# EAGLE board source_eagle (EAGLE 9.6.2)
REV: B
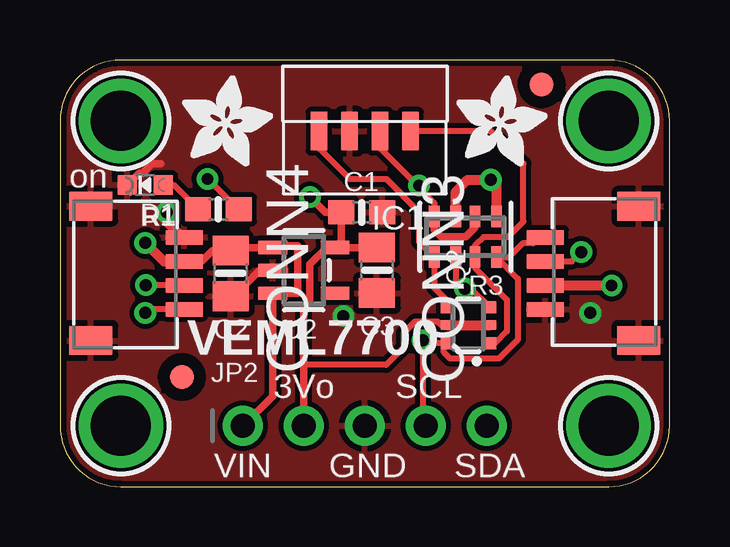
[diagram p0: board, top side]
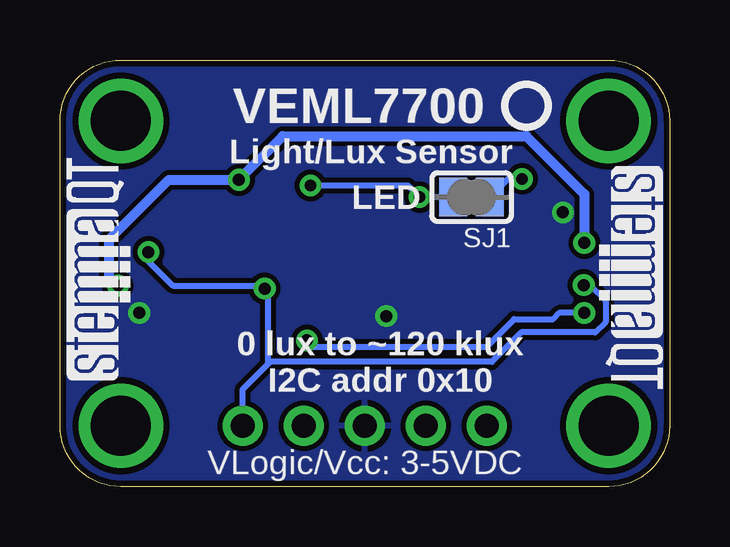
[diagram p1: board, bottom side, seen from below]

Size 25.4 x 17.78 mm. Coordinates in mm from the lower left corner, seen from the top.
Outline: 0,15.24 0,2.54 arc90 2.54,0 22.86,0 arc90 25.4,2.54 25.4,15.24 arc90 22.86,17.78 2.54,17.78 arc90 0,15.24
Copper layers (1*16): Top 0.035mm / dielectric 1.5mm / Bottom 0.035mm
Design rules "adafruit *": minimum track width 8mil, minimum drill 15.5mil, track to track 8mil, track to pad 8mil, pad to pad 8mil, via to via 8mil, smd to smd 8mil, copper to edge 10mil, drill to drill 8mil, minimum pad ring 10mil, minimum via ring 8mil, stop-mask expansion 2mil, vias tented up to drill 20mil, thermal gap 10mil
Net classes: 1 highpower: width 0.305 mm, drill 0.483 mm; 2 lowpower: width 0.254 mm, drill 0.483 mm

## Footprints (pad centres in the part's own frame; a part is rotated, then mirrored left to right if it is on the bottom)
0603-NO = smd 1.075 x 1: 1 -0.85,0; 2 0.85,0
0805-NO = smd 1.24 x 1.5: 1 -0.95,0; 2 0.95,0
JST_SH4 = smd 0.6 x 1.55: 1 -1.5,2.514; 2 -0.5,2.514; 3 0.5,2.514; 4 1.5,2.514 | smd 1.2 x 1.8: MT1 -2.8,-1.386; MT2 2.8,-1.386
CHIPLED_0603_NOOUTLINE = smd 0.8 x 0.8: A 0,-0.75; C 0,0.75
FIDUCIAL_1MM = smd 1 x 1: 1 0,0
VEML7700 = smd 0.7 x 1.6: 1 -1.905,-1.1; 2 -0.635,-1.1; 3 0.635,-1.1; 4 1.905,-1.1
1X05_ROUND = drill 1 pad 1.676: 1 -5.08,0; 2 -2.54,0; 3 0,0; 4 2.54,0; 5 5.08,0
SOT363 = smd 0.5 x 0.5: 1 -0.75,-0.9; 3 0.75,-0.9; 4 0.75,0.9; 6 -0.75,0.9 | smd 0.4 x 0.5: 2 0,-0.9; 5 0,0.9
RESPACK_4X0603 = smd 0.45 x 0.9: 1 -1.3,-0.85; 2 -0.4,-0.85; 3 0.4,-0.85; 4 1.3,-0.85; 5 1.3,0.85; 6 0.4,0.85; 7 -0.4,0.85; 8 -1.3,0.85
SOLDERJUMPER_CLOSEDWIRE = smd 1.168 x 1.6: 1 -0.762,0; 2 0.762,0 | smd 0.635 x 0.203: WIRE 0,0
SOT23-5 = smd 0.55 x 1.2: 1 -0.95,-1.3; 2 0,-1.3; 3 0.95,-1.3; 4 0.95,1.3; 5 -0.95,1.3
MOUNTINGHOLE_2.5_PLATED = drill 2.5 pad 3.2: P$1 0,0

## Placement (x,y rotation side)
C1  0.1uF  [0603-NO]  12.57,11.43 0 top
C2  10uF  [0805-NO]  7.11,8.89 270 top
C3  10uF  [0805-NO]  13.21,9.02 270 top
CONN3  STEMMA_I2C_QT  [JST_SH4]  22.73,8.89 90 top
CONN4  STEMMA_I2C_QT  [JST_SH4]  2.67,8.89 270 top
D1  GREEN  [CHIPLED_0603_NOOUTLINE]  3.56,12.57 90 top
FID3  FIDUCIAL_1MM  [FIDUCIAL_1MM]  5.08,4.57 0 top
FID4  FIDUCIAL_1MM  [FIDUCIAL_1MM]  20.07,16.76 0 top
IC1  VEML7700  [VEML7700]  12.7,13.72 180 top
JP2  [1X05_ROUND]  12.7,2.54 0 top
Q2  BSS138  [SOT363]  17.02,6.73 90 top
R1  47K  [0603-NO]  6.6,11.56 180 top
R3  4.7K  [RESPACK_4X0603]  16.89,10.41 180 top
SJ1  [SOLDERJUMPER_CLOSEDWIRE]  8.26,12.06 180 bottom
U2  AP2112K-3.3  [SOT23-5]  10.16,9.02 270 top
U$1  MOUNTINGHOLE2.5  [MOUNTINGHOLE_2.5_PLATED]  2.54,15.24 0 top
U$2  [KATTNI_STOP]  15.75,7.87 0 bottom
U$4  [ADAFRUIT_3.5MM]  16.51,13.34 0 top
U$17  MOUNTINGHOLE2.5  [MOUNTINGHOLE_2.5_PLATED]  22.86,15.24 0 top
U$19  MOUNTINGHOLE2.5  [MOUNTINGHOLE_2.5_PLATED]  2.54,2.54 0 top
U$21  MOUNTINGHOLE2.5  [MOUNTINGHOLE_2.5_PLATED]  22.86,2.54 0 top
U$22  [ADAFRUIT_3.5MM]  5.08,13.34 0 top
U$25  [PCBFEAT-REV-040]  5.97,15.88 0 bottom
U$30  [STEMMAQT]  22.48,4.45 90 bottom
U$31  [STEMMAQT]  2.92,13.34 270 bottom

## Library data of the parts
C1-C3 CONN3 CONN4 D1 JP2 Q2 R1 R3 SJ1 U$4 U$22 U$25 = microbuilder
FID3 FID4 = microbuilder; BOM: EXCLUDE
IC1 = VEML7700
U2 = adafruit_power
U$1 U$17 U$19 U$21 = adafruit_electromech; BOM: EXCLUDE
U$2 U$30 U$31 = silks

## Nets
3.3V [lowpower]: C1.1 C3.1 IC1.2 JP2.2 Q2.2 Q2.5 R3.2 R3.4 SJ1.2 U2.5
GND [highpower]: C1.2 C2.2 C3.2 CONN3.1 CONN3.MT1 CONN3.MT2 CONN4.1 CONN4.MT1 CONN4.MT2 D1.C IC1.3 JP2.3 U2.2
N$1: D1.A R1.2
N$2 [lowpower]: R1.1 SJ1.1
SCL: CONN3.4 CONN4.4 JP2.4 Q2.6 R3.8
SCL_3V: IC1.1 Q2.1 R3.7
SDA: CONN3.3 CONN4.3 JP2.5 Q2.3 R3.6
SDA_3V: IC1.4 Q2.4 R3.5
VCC [highpower]: C2.1 CONN3.2 CONN4.2 JP2.1 R3.1 R3.3 U2.1 U2.3

## Tracks (layer width: path | path; a pad name or v marks a point on that pad's centre or on a via)
3.3V  (via drill 0.48)
  Top 0.254: 10.16,5.08 13.59,5.08 14.33,5.82 14.33,6.42 14.79,6.88 15.73,6.88 15.88,6.73 Q2.5 | R3.4 15.59,11.84 14.96,12.47 | IC1.2 13.34,14.1 14.96,12.47 | v14.96,12.55 14.96,12.47
  Top 0.305: R3.2 17.29,10.79 16.91,10.41 15.88,10.41 15.59,10.7 R3.4 | JP2.2 10.16,5.08 10.16,7.49 10.41,7.75 10.41,9.27 11.11,9.97 U2.5 | U2.5 C3.1 | U2.5 11.72,10.23 C1.1 11.05,11.43 v10.41,12.06
  Top 0.406: Q2.5 Q2.2
  Bottom 0.254: SJ1.2 v10.41,12.06 10.9,12.55 v14.96,12.55
GND  (via drill 0.5)
  Top 0.305: U2.2 8.32,9.02 7.24,7.94 C2.2 | D1.C 3.31,13.07 3.44,13.07 3.83,13.46 4.19,13.46
  Top 0.406: CONN4.1 5.1,10.39 4.45,11.05 v4.45,11.43
  other vias: 22.1,7.24 11.81,7.11
  pour Top: 0,17.78 25.4,17.78 25.4,0 0,0
  pour Bottom: 0,17.78 25.4,17.78 25.4,0 0,0
N$1
  Top 0.254: R1.2 4.74,12.57 D1.A
N$2  (via drill 0.48)
  Top 0.254: R1.1 7.42,11.56 v6.15,12.83
  Bottom 0.254: v6.15,12.83 6.73,12.83 SJ1.1
SCL  (via drill 0.5)
  Top 0.254: CONN3.4 19.96,10.39 19.71,10.14 19.27,10.14 18.7,9.56 R3.8 19.08,8.68 19.08,6.13 18.29,5.33 16.26,5.33 15.99,5.6 15.99,5.85 Q2.6 15.61,5.98 15.49,6.1 v15.11,6.1 15.11,2.67 JP2.4 | CONN4.4 3.71,7.39 v3.56,7.24
  Bottom 0.254: v15.11,6.1 14.86,5.84 7.62,5.84 6.48,6.99 4.85,6.99 4.59,7.24 v3.56,7.24
SCL_3V
  Top 0.254: Q2.1 18.13,5.98 18.62,6.48 18.62,7.79 17.29,9.12 R3.7 17.29,10.05 17.65,10.41 18.67,10.41 19.3,11.05 19.3,13.46 17.95,14.82 IC1.1
SDA  (via drill 0.5)
  Top 0.254: R3.6 16.49,8.55 16.78,8.26 v16.87,8.26 17.14,8.26 Q2.3 | CONN4.3 v3.58,8.39 v3.58,8.4 | CONN3.3 21.33,9.39 v21.72,9.78
  Bottom 0.254: v3.58,8.4 3.33,8.4 2.67,7.75 2.67,6.86 3.1,6.43 6.18,6.43 7.4,5.21 16.64,5.21 16.75,5.1 | v21.72,9.78 21.72,9.4 20.7,8.38 16.75,8.38 | v16.87,8.26 16.75,8.38 | 16.75,8.38 16.75,5.1 | JP2.5 17.78,4.06 16.75,5.1
SDA_3V
  Top 0.254: Q2.4 16.12,7.77 15.59,8.29 R3.5 14.96,10.2 14.96,11.46 13.59,12.83 12.06,12.83 10.79,14.1 IC1.4
VCC  (via drill 0.48, 0.5)
  Top 0.305: CONN4.2 5.9,9.39 6.35,9.84 C2.1 7.24,9.97 U2.1 8.93,10.03 9.91,10.03 9.91,8.07 U2.3 8.86,3.78 JP2.1
  Top 0.406: R3.3 16.49,12.3 16.98,12.79 v17.95,12.79 18.06,12.79 18.19,12.66 R3.1 | CONN3.2 22.98,8.39 v22.99,8.38 | CONN4.2 4.33,9.39 v3.56,10.16
  Bottom 0.406: v3.56,10.16 3.56,12.19 5.97,14.61 16.13,14.61 v17.95,12.79 20.87,12.79 23.37,10.29 23.37,8.76 v22.99,8.38

## Text on the board
tPlace: on | VEML7700 | 3Vo | SCL | VIN | GND | SDA
bPlace: VEML7700 | Light/Lux Sensor | LED | 0 lux to ~120 klux / I2C addr 0x10 | VLogic/Vcc: 3-5VDC